# Altium PCB Volta-Interface.PcbDoc
Units mm, origin at the board's own origin, x right, y up, seen from the top; angles counter-clockwise.
Board outline 90 x 26 mm, 2 copper layers (Component Side, Bottom Layer), stack 1.071 mm thick; 49 components, 34 nets, 183 pads, 61 vias.
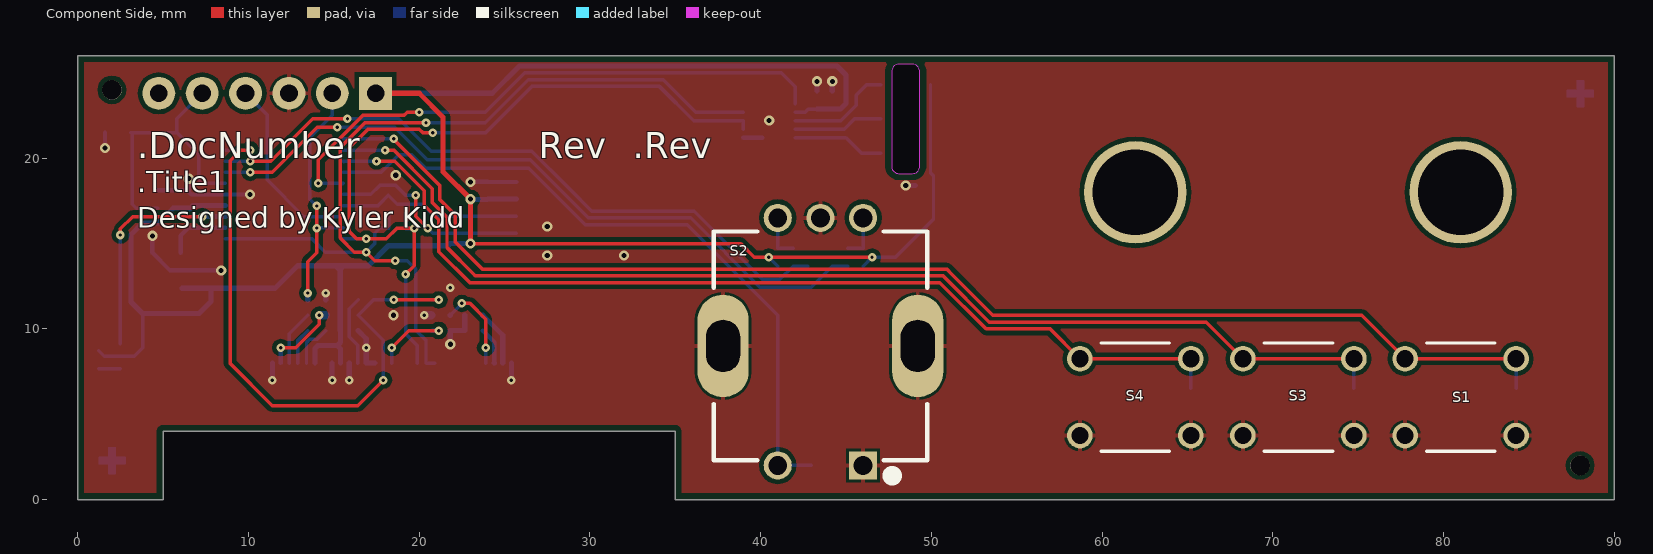
[diagram p0: Component Side view]
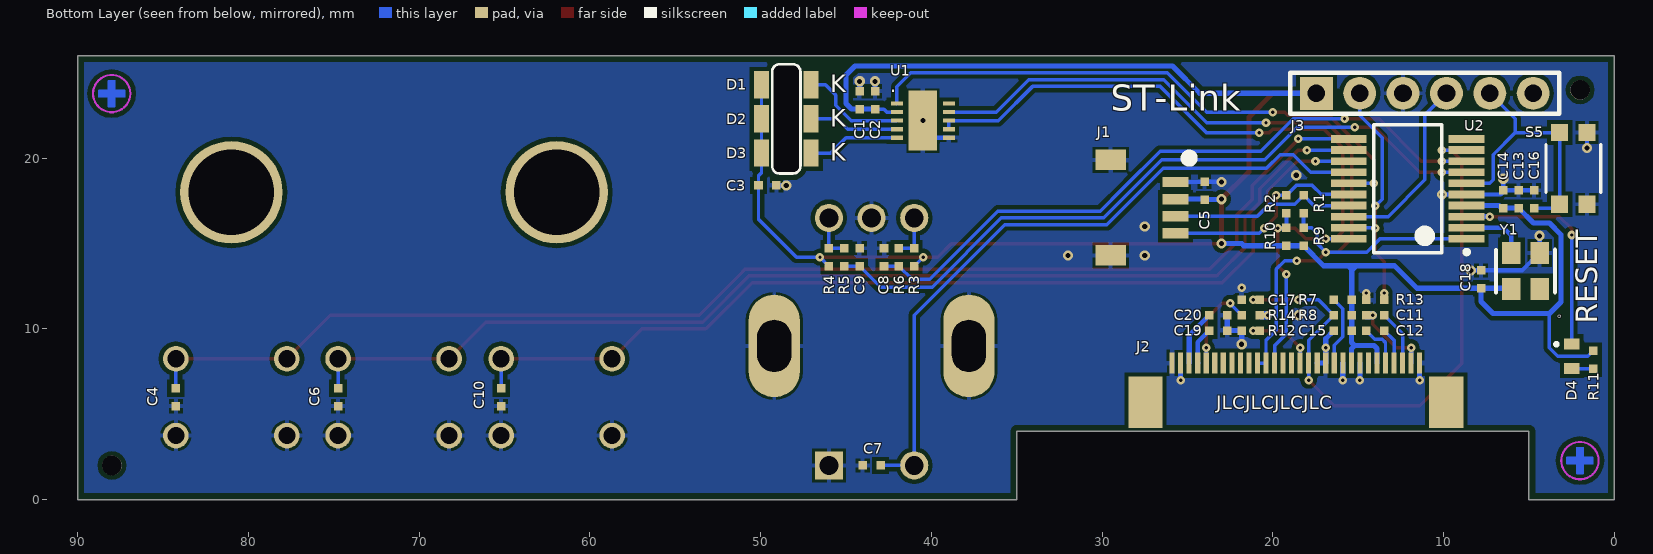
[diagram p1: Bottom Layer view, seen from below]
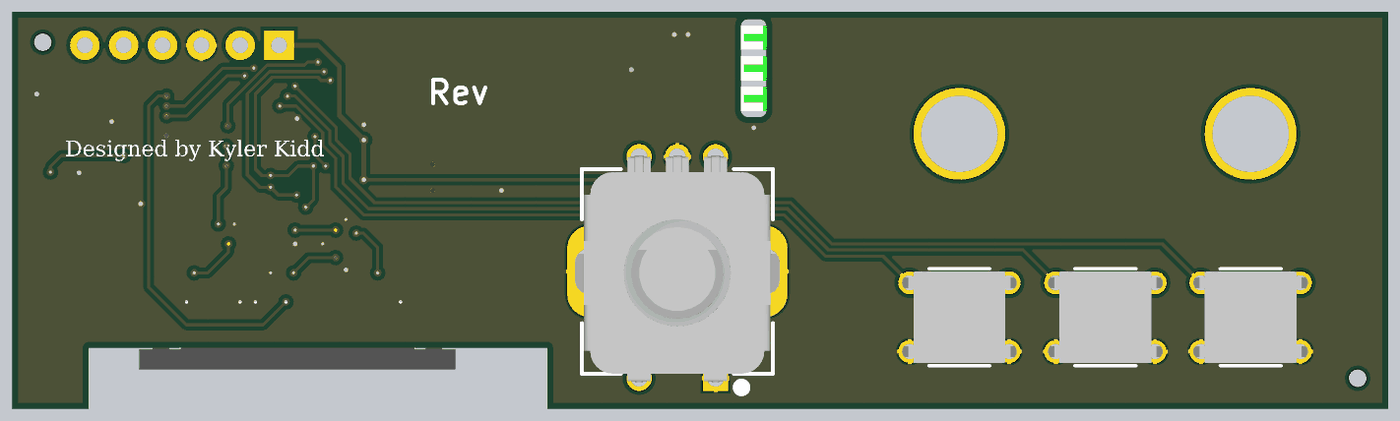
[diagram p2: 3D render of the assembled board from above, using the file's embedded part models]
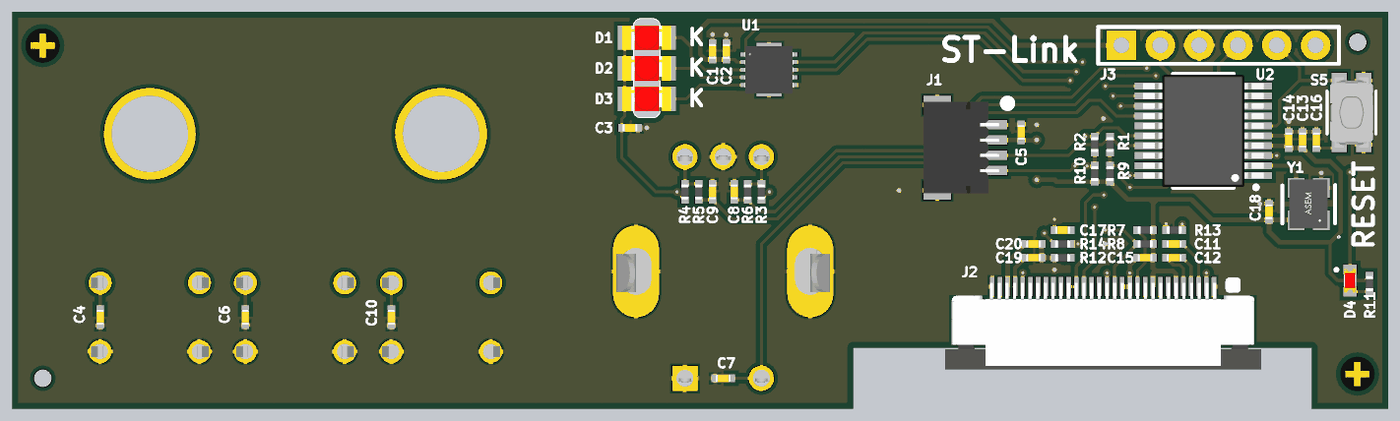
[diagram p3: 3D render of the assembled board from below, using the file's embedded part models]

## Layer stack, top to bottom
Top Solder: solder mask 0.0102, Solder Resist, Dk 3.5
Component Side: signal copper 0.0356
Dielectric 1: core 1, FR-4, Dk 4.2
Bottom Layer: signal copper 0.0356
Solder Side: solder mask 0.0102, Solder Resist, Dk 3.5

## Board outline
0,0 0,26 90,26 90,0 35,0 35,4 5,4 5,0
cut-out: 47.666,19.55 ccw(c48.11,19.544) 48.104,19.1 48.879,19.1 ccw(c48.885,19.544) 49.329,19.537 49.329,25.05 ccw(c48.885,25.056) 48.891,25.5 48.866,25.5 48.116,25.5 ccw(c48.11,25.056) 47.666,25.063

## Design rules (kind name [scope] priority, off if disabled: settings)
BoardOutlineClearance [All] p1: gap=0.381 ignorepadtopadclearanceinfootprint=FALSE
Clearance "Clearance Polygons" [InPolygon] p1: gap=0.254 ignorepadtopadclearanceinfootprint=FALSE except(0: Arc-Hole Track-Hole SMDPad-Hole THPad-Hole Via-Hole Fill-Hole Poly-Hole Region-Hole Text-Hole)
Clearance [All] p2: gap=0.127 ignorepadtopadclearanceinfootprint=FALSE except(0: Arc-Hole Track-Hole SMDPad-Hole THPad-Hole Via-Hole Fill-Hole Poly-Hole Region-Hole Text-Hole)
ComponentClearance "HM-TRP & UFL" [InComponent('X1') vs InComponent('U1')] p1: gap=0 collisioncheckmode=3 verticalgap=0 showdistances=FALSE
ComponentClearance [All] p2: gap=0.025 collisioncheckmode=3 verticalgap=0.025 showdistances=FALSE
DiffPairsRouting [All] p1: maxlimit=10 minlimit=0.127 mostfreqgap=0.203 toplayer_minwidth=0.127 toplayer_maxwidth=0.381 toplayer_prefwidth=0.203 bottomlayer_minwidth=0.127 bottomlayer_maxwidth=0.381 bottomlayer_prefwidth=0.203 maxuncoupledlength=12.7
HoleSize [All] p1: absolutevalues=TRUE maxlimit=6.731 minlimit=0.2 maxpercent=80.000 minpercent=20.000
HoleToHoleClearance [All] p1: gap=0.254 allowstackedmicrovias=FALSE
MinimumAnnularRing [All] p1: minimumring=0.102
MinimumSolderMaskSliver [All] p1: minsoldermaskwidth=0
PlaneClearance [All] p1: clearance=0.254
PlaneConnect [All] p1: planeconnectstyle=Relief reliefexpansion=0.102 reliefentries=4 reliefconductorwidth=0.152 reliefairgap=0.152
PolygonConnect "Via connect style" [isVia] p1: connectstyle=Direct reliefconductorwidth=0.254 reliefentries=4 polygonreliefangle="90 Angle" airgapwidth=0.254
PolygonConnect [All] p2: connectstyle=Relief reliefconductorwidth=0.254 reliefentries=4 polygonreliefangle="90 Angle" airgapwidth=0.152
RoutingCorners [All] p1: cornerstyle=45-Degree minsetback=1.25 maxsetback=1.25
RoutingVias [All] p1: holewidth=0.305 width=0.559 viastyle="Through Hole" minholewidth=0.254 minwidth=0.457 maxholewidth=2.54 maxwidth=2.896
SilkToSilkClearance [All] p1: silktosilkclearance=0
SilkToSolderMaskClearance [IsPad] p1: minsilkscreentomaskgap=0.025 clearancetoexposedcopper=TRUE
SolderMaskExpansion [All] p1: expansion=0.064
Width GND [InNet('GND')] p1: maxlimit=0.762 minlimit=0.254 preferedwidth=0.508
Width Power [InNetClass('Power')] p2: maxlimit=1.016 minlimit=0.508 preferedwidth=0.762
Width 3V3 [InNetClass('3V3')] p3: maxlimit=0.762 minlimit=0.254 preferedwidth=0.508
Width [All] p4: maxlimit=10.16 minlimit=0.152 preferedwidth=0.203
20 further rules are at their usual default settings.

## Classes and differential pairs
component class Interface: C1 C2 C3 C4 C5 C6 C7 C8 C9 C10 C11 C12 C13 C14 C15 C16 C17 C18 C19 C20 D4 J1 J2 J3 R1 R2 R3 R4 R5 R6 R7 R8 R9 R10 R11 R12 R13 R14 S2 S5 U1 U2 Y1

## Components (designator, comment, footprint, x,y, rotation, side; value= is the part's Value field where it differs from the comment)
C1 "2.2uF" 0402 44.2,23.4 r270 bottom
C2 "0.1uF" 0402 43.3,23.4 r270 bottom
C3 "2.2uF" 0402 49.6,18.4 r0 bottom
C4 "2.2uF" 0402 84.25,6 r270 bottom
C5 "2.2uF" 0402 24,18.1 r270 bottom
C6 "2.2uF" 0402 74.75,6 r270 bottom
C7 "2.2uF" 0402 43.5,2 r180 bottom
C8 "0.01uF" 0402 42.775,14.2 r270 bottom
C9 "0.01uF" 0402 44.2,14.2 r270 bottom
C10 "2.2uF" 0402 65.2,6 r270 bottom
C11 "2.2uF" 0402 14,10.8 r180 bottom
C12 "2.2uF" 0402 14,9.9 r0 bottom
C13 "2.2uF" 0402 5.6,17.6 r270 bottom
C14 "0.1uF" 0402 6.5,17.6 r270 bottom
C15 "2.2uF" 0402 15.9,9.9 r180 bottom
C16 "0.1uF" 0402 4.7,17.6 r270 bottom
C17 "0.1uF" 0402 21.3,11.7 r180 bottom
C18 "0.01uF" 0402 7.8,12.9 r270 bottom
C19 "2.2uF" 0402 23.2,9.9 r0 bottom
C20 "10uF" 0402 23.2,10.8 r0 bottom
D1 "LED" 1206_LED 48.5,24.3 r180 bottom
D2 "LED" 1206_LED 48.5,22.3 r180 bottom
D3 "LED" 1206_LED 48.5,20.3 r180 bottom
D4 "LED_GRN" 0603_LED_Red 2.5,8.4 r90 bottom
J1 "CCSH-W10R-04TR-BK-A" PCBCOMPONENT_1 30.4,20.5 r270 bottom
J2 "ER-CON30HT-1" ER-CON30HT-1 18.65,5 r180 bottom
J3 "DNP" 801-93-006-10-012000 11.1,23.8 r180 bottom
R1 "DNP" 0402 18.2,17.3 r90 bottom
R2 "DNP" 0402 19.2,17.3 r90 bottom
R3 "10k" 0402 41,14.2 r90 bottom
R4 "10k" 0402 46,14.2 r90 bottom
R5 "10k" 0402 45.1,14.2 r270 bottom
R6 "10k" 0402 41.9,14.2 r270 bottom
R7 "10k" 0402 15.9,11.7 r180 bottom
R8 "10k" 0402 15.9,10.8 r180 bottom
R9 "2.7k" 0402 18.2,15.4 r270 bottom
R10 "2.7k" 0402 19.2,15.4 r270 bottom
R11 "1k" 0402 1.221,8.2 r90 bottom
R12 "10k" 0402 21.3,9.9 r180 bottom
R13 "10k" 0402 14,11.7 r0 bottom
R14 "390k" 0402 21.3,10.8 r0 bottom
S1 "B3F-105X" B3F-105X 81,6 r180 top
S2 "PEC11R-4115F-S0018" PEC11R-4xxxF-Sxxxx 43.5,9 r180 top locked
S3 "B3F-105X" B3F-105X 71.5,6 r180 top
S4 "B3F-105X" B3F-105X 61.95,6 r180 top
S5 "KMR243GLFG" "KMR 2 SERIES" 2.4,19.4 r90 bottom
U1 "IS31FL3193" DFN-10 40.5,22.2 r180 bottom
U2 "STM32G031F8P6" TSSOP-20 12.1,18.2 r0 bottom
Y1 "ASE-12.000-MHZ-E-T" ASE-XXXXX-X-X-X 5.2,13.4 r90 bottom

## Footprints (in the part's own frame and the unit in brackets; to place one, negate y for a bottom-side part, rotate by r counter-clockwise, add the part's x,y. Pads: shape width x height; smd on the part's side, far side on the other; paste and mask are expansions set on the pad)
0402 [mm] "Chip Capacitor; Body 1.0 x 0.5 mm (LxW typ)"
  rect 0.5x0.5 smd mask+0.038: 1(-0.525,0) 2(0.525,0)
  body extent -0.5,-0.25 0.5,0.25, height 0.6
0603_LED_Red [mm]
  rect 0.65x0.9 smd mask+0.038: 1(-0.725,0) 2(0.725,0)
  silkscreen extent 0.64,0.83 0.76,0.95, body extent -0.8,-0.4 0.8,0.4, height 0.6
801-93-006-10-012000 [mil] "CONN SOCKET STRIP LOPRO 0.100 PITCH 6POS"
  rect 76x76 hole 41 mask+1.5: 1(-250,0)
  round 76 hole 41 mask+1.5: 2(-150,0) 3(-50,0) 4(50,0) 5(150,0) 6(250,0)
  silkscreen extent -310,-48 310,48, body extent -310,-48 310,48, height 165
1206_LED [mm] "SMD LED 3.2 x 1.6 mm (LxW typ)"
  rect 0.9x1.6 smd mask+0.038: 1(-1.45,0) 2(1.45,0)
  body extent -1.6,-0.8 1.6,0.8, height 1.79
ASE-XXXXX-X-X-X [mil] "OSC XO x.xxxMHZ CMOS SMD"
  rect 51x43 smd mask+1.5: 1(-41.5,-32.5) 2(41.5,-32.5) 3(41.5,32.5) 4(-41.5,32.5)
  silkscreen extent -50,-68 49,68, body extent -62,-48 64,50, height 34
B3F-105X [mm]
  round 1.5 hole 1: 1(-3.25,2.25) 1(3.25,2.25) 2(-3.25,-2.25) 2(3.25,-2.25)
  silkscreen extent -2,-3.18 2,3.18, body extent -3.85,-3 3.85,3, height 10
DFN-10 [mm]
  rect 0.7x0.25 smd mask+0.038: 1(-1.525,1) 2(-1.525,0.5) 3(-1.525,0) 4(-1.525,-0.5) 5(-1.525,-1) 6(1.525,-1) 7(1.525,-0.5) 8(1.525,0) 9(1.525,0.5) 10(1.525,1)
  rect 1.65x3.5 smd mask+0.038: 11(0,0)
  body extent -1.6,-1.55 1.6,1.55, height 0.81
ER-CON30HT-1 [mm]
  rect 0.3x1.25 smd paste+0: 1(7.25,3) 2(6.75,3) 3(6.25,3) 4(5.75,3) 5(5.25,3) 6(4.75,3) 7(4.25,3) 8(3.75,3) 9(3.25,3) 10(2.75,3) 11(2.25,3) 12(1.75,3) 13(1.25,3) 14(0.75,3) 15(0.25,3) 16(-0.25,3) 17(-0.75,3) 18(-1.25,3) 19(-1.75,3) 20(-2.25,3) 21(-2.75,3) 22(-3.25,3) 23(-3.75,3) 24(-4.25,3) 25(-4.75,3) 26(-5.25,3) 27(-5.75,3) 28(-6.25,3) 29(-6.75,3) 30(-7.25,3)
  rect 2x3 smd paste+0: S1(8.81,0.7) S2(-8.81,0.7)
  rrect50% 1x1 on Bottom Overlay: ""(8.5,3.1)
  body extent -10.32,-2.4 10.33,3.25, height 2.2
"KMR 2 SERIES" [mm]
  rect 1x1 smd: 1(-2.1,0.8) 1(2.1,0.8) 2(-2.1,-0.8) 2(2.1,-0.8)
  silkscreen extent -1.4,-1.6 1.4,1.6, body extent -2.3,-1.4 2.3,1.4, height 1.92
PCBCOMPONENT_1 [mm]
  rect 0.6x1.55 smd: 1(1.9,4.7) 2(2.9,4.7) 3(3.9,4.7) 4(4.9,4.7)
  rect 1.2x1.8 smd: S1(0.6,0.9) S2(6.2,0.9)
  silkscreen extent 0.3,5.3 0.7,5.7, body extent 0.4,0.01 6.4,4.96, height 3.25
PEC11R-4xxxF-Sxxxx [mm]
  rect 1.65x1.65 hole 1.1: 1(-2.502,7)
  round 1.65 hole 1.1: 2(2.498,7) A(-2.502,-7.5) B(2.498,-7.5) COM(-0.002,-7.5)
  oval 3x6 hole 1.981 slot 3.048 at 90 deg: S1(-5.702,0) S2(5.698,0)
  silkscreen extent -6.25,-6.7 6.25,7.85, body extent -7,-7.6 7,7.3, height 21.6
TSSOP-20 [mm] "Plastic Small Outline"
  rect 2.1x0.45 smd mask+0.038: 1(-3.45,2.925) 2(-3.45,2.275) 3(-3.45,1.625) 4(-3.45,0.975) 5(-3.45,0.325) 6(-3.45,-0.325) 7(-3.45,-0.975) 8(-3.45,-1.625) 9(-3.45,-2.275) 10(-3.45,-2.925) 11(3.45,-2.925) 12(3.45,-2.275) 13(3.45,-1.625) 14(3.45,-0.975) 15(3.45,-0.325) 16(3.45,0.325) 17(3.45,0.975) 18(3.45,1.625) 19(3.45,2.275) 20(3.45,2.925)
  silkscreen extent -3.57,-3.75 2,3.82, body extent -3.95,-3.66 3.95,3.67, height 1.98

## Part data
C1 C3 C4 C5 C6 C7 C10 C13: library part CAP, "Multilayer Ceramic Capacitors MLCC - SMD/SMT 2.2UF 25V 10% 0402", Manufacturer="Murata Electronics", Part Number=GRM155R61E225KE11D, Voltage=25V, ClassName=Interface
C2 C14 C16 C17: library part CAP, "CAP CER 0.1UF 50V X7R 0402", Manufacturer="Taiyo Yuden", Part Number=UMK105B7104KVHF, Voltage=50V, ClassName=Interface
C8 C9 C18: library part CAP, "CAP CER 0.01UF 100V X7R 0402", Manufacturer="Taiyo Yuden", Part Number=HMR105B7103MV-F, Voltage=100V, ClassName=Interface
C11 C12 C15 C19 C20: library part CAP, "CAP CER 10UF 10V X6S 0603", Manufacturer="Murata Electronics", Part Number=GRM188C81A106MA73D, Voltage=25V, ClassName=Interface
D4: library part LED_Red, "Standard LEDs - SMD HE Red 645 nm Water Clear", Manufacturer=Bivar, Part Number=SM0603HCL, ClassName=Interface
J1: Manufacturer=JST, ClassName=Interface, Part Number=CCSH-W10R-04TR-BK-A
J2: "30 PINS 0.5 PITCH SMD TOP CONTACT CONN", Manufacturer="EastRising Technology", ClassName=Interface, Part Number=ER-CON30HT-1
J3: library part 801-93-006-10-012000, "CONN SOCKET STRIP LOPRO 6POS", Manufacturer=Mill-Max, ClassName=Interface, Part Number=801-93-006-10-012000
R1 R2: library part RES, "Thick Film Resistors - SMD 1/16watt 0ohm Commercial Use", Manufacturer="Vishay / Dale", Part Number=CRCW04020000Z0EDC, ClassName=Interface
R3 R4 R5 R6 R13: library part RES, "Thick Film Resistors - SMD 10K OHM 1%", Manufacturer=Bourns, Part Number=CR0402-FX-1002GLF, ClassName=Interface
R7 R8 R12 R14: library part RES, "Thick Film Resistors - SMD 0603 5.1Kohm 5% High Voltage", Manufacturer="ROHM Semiconductor", Part Number=KTR03EZPJ512, ClassName=Interface
R9 R10: library part RES, "Thick Film Resistors - SMD 0402 2.7Kohms 1% AEC-Q200", Manufacturer=Panasonic, Part Number=ERJ-2RKF2701X, ClassName=Interface
R11: library part RES, "Thick Film Resistors - SMD ResA 0402 1k 1% 63mW TC100", Manufacturer=Bourns, Part Number=CR0402AFX-1001GLF, ClassName=Interface
S1 S3 S4: "SWITCH TACTILE SPST-NO 0.05A 24V", Manufacturer="Omron Electronics Inc-EMC Div", Part Number=B3F-105X
S2: library part PEC11R-4xxxF-Sxxxx, "ROTARY ENCODER MECHANICAL XXPPR", Manufacturer=Bourns, ClassName=Interface, Part Number=PEC11R-4115F-S0018
S5: library part "KMR 2 Series", "Tactile Switch SPST-NO Top Actuated Surface Mount", Manufacturer=C&K, Part Number=KMR243GFLG, ClassName=Interface
U1: "IC LED DRIVER LINEAR 42MA 10DFN", Manufacturer="Lumissil Microsystems", Part Number=IS31FL3193-DLS2-TR, ClassName=Interface
U2: library part STM32G031F6P6, "IC MCU 32BIT 64KB FLASH 20TSSOP", Manufacturer=STMicroelectronics, ClassName=Interface, Part Number=STM32G031F8P6
Y1: library part ASE-XXXXX-MHZ-X-X, "OSC XO 12.000MHZ CMOS SMD", Manufacturer=Abracon, ClassName=Interface, Part Number=ASE-12.000-MHZ-E-T

## Free pads (board coordinates)
  round 1.152 hole 1.152 unplated: TH(2,24) TH(88,2)
  round 6 hole 5: ""(61.95,18) ""(81,18)

## Via types
v1: diameter 0.5, hole 0.2, Component Side to Bottom Layer, tented both sides, 43 vias
v2: diameter 0.6, hole 0.3, Component Side to Bottom Layer, tented both sides, 18 vias

## Nets (pads, with @x,y where several pads share a name; then routed paths per layer and width w, separated by ;. In a path a pad name is that pad's centre, name@x,y a point inside that pad or via, vN(x,y) a via of type N, cw(c..) or ccw(c..) an arc to the next point about the centre after c; other vN are vias at no path point)
+3.3V: C1.2 C2.2 C3.2 C5.2 C13.2 C14.2 C15.2 C18.2 D1.1 D2.1 D3.1 J1.2 J2.6 J2.9 J3.1 R3.1 R4.1 R7.2 R8.2 R9.2 R10.2 R11.2 U1.2 U2.4 Y1.4 | length 134.2
  Component Side w0.203: v2@22.9,15 v2(23,15) 38.821,15 39.621,14.2 v1(40.475,14.2) v1(46.525,14.2)
  Component Side w0.305: J3.1 20,23.8 21.4,22.4 21.4,19.2 v2(23,17.6) v2(23,15)
  Bottom Layer w0.203: R11.2 1.546,8.4 3.3,8.4 3.8,8.9 3.8,10.9 ; C5.2 C5.2@24.025,17.6 ; v1(40.475,14.2) R3.1 ; U1.2 42.6,22.7 42.775,22.875 C2.2 ; R4.1 v1(46.525,14.2) 47.9,14.2 50.125,16.425 C3.2 50.125,18.975 49.95,19.15 D3.1 D2.1 D1.1
  Bottom Layer w0.305: Y1.4@6.1,12.4 6.125,12.375 C18.2 ; C14.2 C13.2 5.6,17.064 4.736,16.2 3.8,16.2 3.117,15.517 3.117,11.583 3.8,10.9 7.1,10.9 7.8,11.6 C18.2 ; C14.2@6.55,17.025 6.75,17.225 U2.4 ; J2.6 13.9,8.85 14.069,9.019 15.219,9.019 ; 15.375,13.425 15.1,13.7 ; J2.9 15.4,8.838 15.219,9.019 ; J3.1 24.284,23.8 25.884,25.4 44.469,25.4 45,24.869 45,23.2 44.675,22.875 C1.2 C2.2 ; v2(23,15) 21.825,15 21.7,14.875 R10.2 R9.2 17.025,13.7 15.6,13.7 ; v2(23,17.6) 23.025,17.575 C5.2 ; C5.2@24.025,17.6 J1.2 ; C18.2 11.545,12.375 12.87,13.7 15.1,13.7 ; 15.1,13.7 15.6,13.7 ; 15.219,9.019 15.4,9.2 15.4,9.875 C15.2 R8.2 R7.2 15.375,12.7 15.375,13.475 15.6,13.7
BUTTON_A: C4.1 S1.2 U2.11 | length 77.2
  Component Side w0.203: v1@18.475,21.125 21.2,18.4 21.2,17.576 22.1,16.676 22.1,15.1 23.694,13.506 50.894,13.506 51.2,13.2 53.6,10.8 ; 53.602,10.798 75.202,10.798 77.75,8.25 S1.2@84.25,8.25
  Bottom Layer w0.203: U2.11 v1@18.475,21.125 ; C4.1 S1.2@84.25,8.25
  other v1: 18.5,21.125
BUTTON_B: C6.1 S3.2 U2.12 | length 67.5
  Component Side w0.203: v1(18,20.475) 18.5,20.475 20.775,18.2 20.775,17.4 21.63,16.545 21.63,14.77 23.2,13.2 23.3,13.1 50.7,13.1 53.4,10.4 66.1,10.4 68.25,8.25 S3.2@74.75,8.25
  Bottom Layer w0.203: U2.12 v1(18,20.475) ; C6.1 S3.2@74.75,8.25
BUTTON_C: C10.1 S4.2 U2.13 | length 57.9
  Component Side w0.203: v1(17.5,19.825) 18.575,19.825 20.3,18.1 20.3,17.251 21.154,16.397 21.154,14.521 22.975,12.7 ; 22.9,12.8 23,12.7 50.5,12.7 53.2,10 56.95,10 58.7,8.25 S4.2@65.2,8.25
  Bottom Layer w0.203: U2.13@15.575,19.8 U2.13 v1(17.5,19.825) ; C10.1 S4.2@65.2,8.25
DISP_RST: C17.2 J2.14 R8.1 U2.9 | length 35.3
  Component Side w0.203: v1(10.1,20.475) 9.55,20.475 8.929,19.854 8.929,7.971 11.4,5.5 16.4,5.5 v1(17.9,7) ; v1(18.5,11.7) v1(21.15,11.7)
  Bottom Layer w0.203: U2.9 v1(10.1,20.475) ; v1(17.9,7) J2.14 17.9,9.325 R8.1 17.325,11.7 v1(18.5,11.7) ; C17.2 v1(21.15,11.7)
ENC_A: C9.2 R5.2 U2.7 | length 41.9
  Component Side w0.203: v1(10.1,19.175) 11.4,19.175 14.025,21.8 v1(15.2,21.8)
  Bottom Layer w0.203: U2.7 v1(10.1,19.175) ; v1(15.2,21.8) 18.575,21.8 20.475,19.9 26.5,19.9 29.9,16.5 35.9,16.5 39.954,12.446 42.971,12.446 C9.2 R5.2
ENC_B: C8.2 R6.2 U2.8 | length 39.4
  Component Side w0.203: v1(10.1,19.825) 11.3,19.825 13.775,22.3 v1(15.8,22.3)
  Bottom Layer w0.203: U2.8 v1(10.1,19.825) ; v1(15.8,22.3) 18.8,22.3 20.7,20.4 26.6,20.4 28.75,18.25 30.1,16.9 36.102,16.9 40.102,12.9 41.125,12.9 R6.2 C8.2
ENC_SW: C7.2 S2.2 U2.14 | length 40.5
  Bottom Layer w0.203: U2.14 17.775,19.175 18.8,20.2 19.573,20.2 20.373,19.4 26.425,19.4 29.725,16.1 32.2,16.1 ; 32.225,16.1 35.7,16.1 41.002,10.798 S2.2 C7.2
EXT_SCL: J1.4 R2.2 U2.16 | length 12.3
  Component Side w0.203: v1(19.8,17.825) 19.8,16.6 v1(20.5,15.9) ; v1@20.527,15.927 v1@20.554,15.9
  Bottom Layer w0.203: U2.16 17.175,17.875 17.7,18.4 18.625,18.4 R2.2 v1(19.8,17.825) ; v1(20.5,15.9) 20.8,15.6 J1.4
EXT_SDA: J1.3 R1.2 U2.17 | length 10.9
  Bottom Layer w0.203: U2.17 17.6,17.225 R1.2 18.725,17.3 20.2,17.3 20.9,16.6 J1.3
GND: C1.1 C2.1 C3.1 C4.2 C5.1 C6.2 C7.1 C8.1 C9.1 C10.2 C13.1 C14.1 C15.1 C16.1 C17.1 C18.1 C19.1 C20.1 J1.1 J1.S1 J1.S2 J2.1 J2.8 J2.10 J2.12 J2.13 J2.29 J2.30 J3.3 R12.1 R13.2 R14.1 S1.1 S2.1 S2.COM S2.S1 S2.S2 S3.1 S4.1 S5.2 U1.6 U1.11 U2.5 Y1.2 | length 28
  Bottom Layer w0.254: v2(1.6,20.6) S5.2@1.6,21.5 ; v2(4.374,15.45) Y1.2 5.404,13.425 C18.1 v2(8.4,13.425) ; C16.1 C13.1 C14.1 v2(6.5,18.8) ; C14.1@6.5,18.025 6.65,17.875 U2.5 v2(10.084,17.875) ; v2(23,18.6) 23.025,18.625 C5.1 24.025,18.6 J1.1 ; U1.6 U1.11@40.1,21.2
  Bottom Layer w0.305: v1(11.4,7) J2.1 ; R13.2 v1(14.525,12.1) ; v1(14.9,7) J2.8 ; v1(15.9,7) J2.10 ; C15.1 16.9,9.425 v1(16.9,8.9) J2.12 J2.13 ; v2(21.825,9.1) R12.1 C19.1 C20.1 ; v1(25.4,7) J2.29 ; C2.1 v2(43.3,24.5) ; C1.1 v2(44.2,24.5) ; v2(48.5,18.4) C3.1
  Bottom Layer w0.508: v1(20.3,10.8) R14.1@20.7,10.8
  other v1: 21.825,12.4
  other v2: 18.5,10.8 27.5,14.3 32,14.3 27.5,16 18.625,19 40.5,22.2
LED_DVR_EN: U1.1 U2.15 | length 34.2
  Component Side w0.203: v1(14.1,18.525) 14.1,19.915 16.685,22.5 19.1,22.5 19.3,22.7 v1(20,22.7)
  Bottom Layer w0.203: v1(14.1,18.525) U2.15 U2.15@15.525,18.5 ; v1(20,22.7) 23.875,22.7 26.175,25 41.2,25 42.025,24.175 U1.1
MCU_SCL: J2.18 R2.1 R10.1 U1.7 U1.8 U2.20 | length 46.3
  Component Side w0.203: v1(19.2,13.2) 19.7,13.7 v1(19.7,15.9) 18.7,15.9 18.075,15.275 v1(16.9,15.275) 16.329,15.275 15.9,15.704 15.9,20.6 17,21.7 20,21.7 20.2,21.5 v1(20.8,21.5)
  Bottom Layer w0.203: U2.20 v1(16.9,15.275) ; v1(19.2,13.2) 19.2,9.719 19.9,9.019 J2.18 ; v1(20.8,21.5) 23.9,21.5 26.6,24.2 34.075,24.2 36.075,22.2 U1.8 U1.7
  Bottom Layer w0.254: R2.1 R10.1 19.225,15.9 v1(19.7,15.9)
MCU_SDA: J2.19 J2.20 R1.1 R9.1 U1.9 U2.1 | length 54.4
  Component Side w0.203: v1(18.6,14) 17.4,14 v1(16.9,14.5) 16.2,14.5 15.375,15.325 15.375,20.625 16.825,22.075 v1(20.4,22.075)
  Bottom Layer w0.203: U2.1 13.725,15.275 14.5,14.5 v1(16.9,14.5) 17.4,15 17.4,15.6 17.725,15.925 R9.1 ; v1(18.6,14) 19.306,14 19.8,13.506 19.8,9.925 20.4,9.325 J2.19 J2.20 ; v1(20.4,22.075) 23.875,22.075 26.4,24.6 34.3,24.6 36.2,22.7 U1.9
  Bottom Layer w0.254: R9.1 R1.1
NetC11_1: C11.1 J2.2 | length 4.6
  Component Side w0.203: v1(11.9,8.9) 12.775,8.9 14.15,10.275 v1(14.15,10.8)
  Bottom Layer w0.254: J2.2 v1(11.9,8.9)
  Bottom Layer w0.508: v1(14.15,10.8) C11.1
NetC11_2: C11.2 J2.3 | length 3.2
  Bottom Layer w0.203: J2.3 12.4,9.725 C11.2
NetC12_1: C12.1 J2.4 | length 2.1
  Bottom Layer w0.203: J2.4 12.9,9.325 C12.1
NetC12_2: C12.2 J2.5 | length 2.6
  Bottom Layer w0.203: J2.5 13.4,9.2 13.6,9.4 14.025,9.4 C12.2
NetC19_2: C19.2 J2.27 | length 2.2
  Bottom Layer w0.254: C19.2 24.404,9.221 J2.27@24.404,8.004
  Bottom Layer w0.305: J2.27 J2.27@24.404,8.004
NetC20_2: C20.2 J2.28 | length 3.3
  Bottom Layer w0.305: C20.2 24.9,9.625 J2.28
NetD1_2: D1.2 U1.3 | length 6.2
  Bottom Layer w0.203: U1.3 44.7,22.2 45.6,23.1 45.6,23.7 46.2,24.3 D1.2
NetD2_2: D2.2 U1.4 | length 5.3
  Bottom Layer w0.203: U1.4 44.9,21.7 45.5,22.3 D2.2
NetD3_2: D3.2 U1.5 | length 5.4
  Bottom Layer w0.203: U1.5 45,21.2 45.9,20.3 D3.2
NetD4_1: D4.1 R11.1 | length 1.3
  Bottom Layer w0.203: R11.1 D4.1
NetD4_2: D4.2 U2.3 | length 13.2
  Component Side w0.203: v1(2.5,15.5) 2.5,15.861 3.214,16.575 v1(7.3,16.575)
  Bottom Layer w0.203: D4.2 v1(2.5,15.5)
  Bottom Layer w0.305: v1(7.3,16.575) U2.3
NetJ2_11: J2.11 R7.1 | length 4.1
  Bottom Layer w0.203: J2.11 16.4,9.05 15.9,9.55 15.9,11.175 R7.1
NetJ2_26: J2.26 R14.2 | length 5.3
  Component Side w0.203: v1(22.5,11.5) 22.975,11.5 23.9,10.575 v1(23.9,8.9)
  Bottom Layer w0.203: R14.2 22.5,11.475 v1(22.5,11.5) ; J2.26 v1(23.9,8.9)
NetR3_2: R3.2 R6.1 S2.B | length 2.7
  Bottom Layer w0.203: S2.B 41,16.498 R3.2 R6.1
NetR4_2: R4.2 R5.1 S2.A | length 2.7
  Bottom Layer w0.203: R5.1 R4.2 46,16.498 S2.A
NetU2_2: U2.2 Y1.3 | length 3.8
  Bottom Layer w0.254: Y1.3 6.025,15.457 6.493,15.925 U2.2
NRST: C16.2 J3.5 S5.1 U2.6 | length 16.3
  Bottom Layer w0.203: S5.1@3.1,21.5 3.2,21.4 3.2,17.3 3.425,17.075 C16.2 ; S5.1@3.2,21.5 5.8,21.5 ; J3.5 5.8,22.31 5.8,21.5 ; U2.6 7.3,18.525 7.1,18.725 7.1,20.2 5.8,21.5
SA0: J2.15 R12.2 | length 4.4
  Component Side w0.203: v1(18.4,8.9) 19.401,9.901 v1(21.15,9.901)
  Bottom Layer w0.203: J2.15 v1(18.4,8.9)
  Bottom Layer w0.254: R12.2 v1(21.15,9.901)
SWCLK: J3.2 R13.1 U2.19 | length 14.6
  Component Side w0.203: v1(13.475,12.1) 13.475,13.925 14,14.45 v1(14,15.908) v1(14,17.2)
  Bottom Layer w0.203: v1(14,15.908) 14.017,15.925 U2.19 ; v1(14,17.2) 13.6,17.6 13.6,21.2 14.91,22.51 J3.2
  Bottom Layer w0.305: R13.1 v1(13.475,12.1)
SWDIO: J3.4 U2.18 | length 10.9
  Bottom Layer w0.203: J3.4 11.1,22.53 11.1,18.725 13.25,16.575 U2.18
pads on no net: J2. J2.7 J2.16 J2.17 J2.21 J2.22 J2.23 J2.24 J2.25 J2.S1 J2.S2 J3.6 U1.10 U2.10 Y1.1

## Polygon pours and split planes (outlines as drawn)
GND on Component Side "Top_GND" (solid, remove dead copper, pour order 56): 0,0 90,0 90,26 0,26
GND on Bottom Layer "Bottom_GND" (solid, remove dead copper, pour order 57): 0,0 90,0 90,26 0,26

## Keep-outs
Bottom Layer:
  circle w0.127: c88.01,23.782 r1.092
  circle w0.127: c2.01,2.282 r1.092

## Other copper
Bottom Layer:
  region: 88.22,24.563 88.228,24.544 88.228,24 88.772,24 88.791,23.992 88.799,23.973 88.799,23.592 88.791,23.572 88.772,23.564 88.228,23.564 88.228,23.02 88.22,23.001 88.201,22.993 87.82,22.993 87.8,23.001 87.792,23.02 87.792,23.564 87.248,23.564 87.229,23.572 87.221,23.592 87.221,23.973 87.229,23.992 87.248,24 87.796,24 87.792,24.544 87.796,24.554 87.8,24.563 87.81,24.567 87.819,24.572 87.819,24.571 87.82,24.572 88.201,24.572
  region: 2.22,3.063 2.228,3.044 2.228,2.5 2.772,2.5 2.791,2.492 2.799,2.473 2.799,2.092 2.791,2.072 2.772,2.064 2.228,2.064 2.228,1.52 2.22,1.501 2.201,1.493 1.82,1.493 1.8,1.501 1.792,1.52 1.792,2.064 1.248,2.064 1.229,2.072 1.221,2.092 1.221,2.473 1.229,2.492 1.248,2.5 1.796,2.5 1.792,3.044 1.796,3.054 1.8,3.063 1.81,3.067 1.819,3.072 1.819,3.071 1.82,3.072 2.201,3.072

## Silkscreen, mask and mechanical layers (free items; w line width, h text height)
Top Overlay:
  text ".DocNumber" at 3.5,20 h1.52
  text "Rev" at 27,20 h1.52
  text ".Rev" at 32.5,20 h1.52
  text ".Title1" at 3.5,18 h1.22
  text "Designed by Kyler Kidd" at 3.5,15.5 h2.03
Bottom Overlay:
  lines w0.152: 48.866,25.5 48.116,25.5 ccw(c48.11,25.056) 47.666,25.063 47.666,19.55 ccw(c48.11,19.544) 48.104,19.1 48.879,19.1 ccw(c48.885,19.544) 49.329,19.537 49.329,25.05 ccw(c48.885,25.056) 48.891,25.5
  text "ST-Link" at 29.5,22.784 h1.52
  text "RESET" at 1,10.3 h1.27 r270
  text "JLCJLCJLCJLC" at 23.3,5.3 h0.8
Solder Side:
  circle w0.254: c88.014,23.782 r1.001
  circle w0.254: c2.014,2.282 r1.001
  rectangle: 87.064,23.357 88.939,24.232
  rectangle: 87.239,24.207 88.789,24.582
  rectangle: 87.589,22.757 88.389,24.807
  rectangle: 87.214,22.982 88.789,23.382
  rectangle: 1.214,1.482 2.789,1.882
  rectangle: 1.589,1.257 2.389,3.307
  rectangle: 1.239,2.707 2.789,3.082
  rectangle: 1.064,1.857 2.939,2.732
  region: 88.22,24.563 88.228,24.544 88.228,24 88.772,24 88.791,23.992 88.799,23.973 88.799,23.592 88.791,23.572 88.772,23.564 88.228,23.564 88.228,23.02 88.22,23.001 88.201,22.993 87.82,22.993 87.8,23.001 87.792,23.02 87.792,23.564 87.248,23.564 87.229,23.572 87.221,23.592 87.221,23.973 87.229,23.992 87.248,24 87.796,24 87.792,24.544 87.796,24.554 87.8,24.563 87.81,24.567 87.819,24.572 87.819,24.571 87.82,24.572 88.201,24.572
  region: 2.22,3.063 2.228,3.044 2.228,2.5 2.772,2.5 2.791,2.492 2.799,2.473 2.799,2.092 2.791,2.072 2.772,2.064 2.228,2.064 2.228,1.52 2.22,1.501 2.201,1.493 1.82,1.493 1.8,1.501 1.792,1.52 1.792,2.064 1.248,2.064 1.229,2.072 1.221,2.092 1.221,2.473 1.229,2.492 1.248,2.5 1.796,2.5 1.792,3.044 1.796,3.054 1.8,3.063 1.81,3.067 1.819,3.072 1.819,3.071 1.82,3.072 2.201,3.072
Mechanical 1:
  lines w0.254: 58.862,12.452 cw(c61.95,18) 65.038,12.452 ; 58.875,12.45 61.95,12.45 65.025,12.45 ; 77.912,12.452 cw(c81,18) 84.088,12.452 ; 77.925,12.45 81,12.45 84.075,12.45 ; 0,0 5,0 5,4 35,4 35,0 90,0 90,26 0,26 0,0
Mechanical 15:
  lines w0.2: 60.95,18 62.95,18 ; 61.95,17 61.95,19 ; 80,18 82,18 ; 81,17 81,19
ASSY_TOP:
  drawing of 322 lines, arcs and shapes, not listed
  text "SH" at 401.173,299.933 h2.54
  text "DWG NO" at 326.021,299.518 h2.54
  text ".DocNumber" at 342.672,296.678 h3.05
  text "2" at -196.323,296.19 h5.08
  text "4" at 19.75,296.19 h5.08
  text "8" at 444.108,296.19 h5.08
  text "1" at -304.051,296.03 h5.08
  text "3" at -88.329,296.03 h5.08
  text "5" at 127.749,296.03 h5.08
  text "6" at 235.696,296.03 h5.08
  text "1" at 406.172,295.662 h3.05
  text "REVISION HISTORY" at 352.324,289.283 h2.54
  text "REV" at 327.94,283.216 h2.54
  text "DESCRIPTION" at 373.66,283.216 h2.54
  text "DATE" at 432.08,283.216 h2.54
  text "APPROVED" at 462.56,283.216 h2.54
  text ".Hist1Rev" at 328.845,278.615 h2.54
  text ".Hist1Desc" at 340.64,278.136 h2.54
  text ".Hist1Date" at 424.46,278.136 h2.54
  text ".Hist1Appr" at 454.94,278.136 h2.54
  text "NOTES" at -317.22,276.86 h10.16
  text ".Hist2Rev" at 328.845,273.002 h2.54
  text ".Hist2Desc" at 340.64,272.522 h2.54
  text ".Hist2Date" at 424.46,272.522 h2.54
  text ".Hist2Appr" at 454.94,272.522 h2.54
  text "1. DIMENSIONING AND TOLERANCING PER ASME Y14.5M-1994" at -317.22,269.24 h5.08
  text ".Hist3Rev" at 328.845,267.414 h2.54
  text ".Hist3Desc" at 340.64,266.934 h2.54
  text ".Hist3Date" at 424.46,266.934 h2.54
  text ".Hist3Appr" at 454.94,266.934 h2.54
  text "2. INTERPRET PER ASME Y14.100M" at -317.22,261.62 h5.08
  text "3. ASSEMBLE PER IPC-A-610, CLASS 2" at -317.22,254 h5.08
  text "4. SOLDER PER J-STD-001, CLASS 2. USE LEAD-FREE SOLDER" at -317.22,246.38 h5.08
  text "5. ALL PARTS SHOWN MAY NOT BE INSTALLED. FOR SCHEMATIC, SEE SEPARATE PARTS LIST" at -317.22,238.76 h5.08
  text "A" at -346.12,232.525 h5.08
  text "A" at 492.167,232.525 h5.08
  text "6. DATA INCLUDED IN PARENTHESIS IS FOR REFERENCE ONLY" at -317.22,231.14 h5.08
  text "7. FOR COMPONENTS WITH REFERENCE DESIGNATORS, REFER TO PARTS LIST BY REFERENCE DESIGNATION" at -317.22,223.52 h5.08
  text "8. ELECTROSTATIC DISCHARGE CONTROL PROGRAM FOR PROTECTION OF ELECTRICAL AND ELECTRONIC" at -317.22,215.9 h5.08
  text "PARTS, ASSEMBLIES, AND EQUIPMENT SHALL BE PER IPC-610 OR BETTER" at -317.22,208.28 h5.08
  text "9. THE PCB MATERIAL MANUFACTURER'S RECOMMENDATIONS FOR PCB MATERIAL STORAGE, PRE-PROCESS" at -317.22,200.66 h5.08
  text "BAKEOUT, PROCESSING AND MATERIAL HANDLING SHALL BE STRICTLY FOLLOWED DURING ALL ASSEMBLY" at -312.14,193.04 h5.08
  text "PROCESSES. DEVIATION FROM THESE STANDARDS REQUIRES WRITTEN AUTHORIZATION FROM OCEAN OPTICS, INC" at -312.14,185.42 h5.08
  text "10. MARK LAST 3 DIGITS OF DRAWING NUMBER (-XXX) IN A CLEAR AND LEGIBLE MANNER USING POLYIMIDE BRADY LABEL" at -319.76,177.8 h5.08
  text "11. MARK DOCUMENT REVISION IN A CLEAR AND LEGIBLE MANNER USING POLYIMIDE BRADY LABEL" at -319.76,170.18 h5.08
  text "12. ALL PROCESSES AND PROCEDURES SHALL BE ROHS COMPLIANT" at -319.76,162.56 h5.08
  text "13. COMPLETED CIRCUIT CARD ASSEMBLIES SHALL BE PACKAGED INDIVIDUALLY" at -319.76,154.94 h5.08
  text "IN STATIC SHIELDING PACKAGING IN ACCORDANCE WITH ANSI/ESD-S-20.20" at -312.14,147.32 h5.08
  text "B" at -346.17,92.665 h5.08
  text "B" at 492.117,92.665 h5.08
  text "Dimensions in mm" at 374,-38 h6.35
  text "Scale  3:1" at 269,-42 h12.7
  text "C" at -345.585,-46.808 h5.08
  text "C" at 492.701,-46.808 h5.08
  text "SEE SEPARATE PARTS LIST." at 223.546,-165.602 h10.16
  text "DFTG" at 264.44,-174.521 h2.54
  text ".NameDftg" at 277.648,-174.521 h2.54
  text ".DateDftg" at 317.272,-174.521 h2.54
  text "UNLESS OTHERWISE SPECIFIED," at 209.576,-178.839 h2.03
  text "MATERIAL:" at 146.406,-179.064 h2.54
  text "ENG" at 264.44,-181.125 h2.54
  text ".NameEng" at 277.648,-181.125 h2.54
  text ".DateEng" at 317.272,-181.125 h2.54
  text "INCHES" at 245.644,-182.366 h2.03
  text "DIMENSIONS ARE IN" at 209.576,-182.395 h2.03
  text "D" at -345.838,-186.507 h5.08
  text "D" at 492.449,-186.507 h5.08
  text "MECH" at 264.44,-186.713 h2.54
  text "*" at 277.648,-187.221 h2.54
  text "*" at 317.272,-187.221 h2.54
  text "TITLE:" at 356.25,-189.253 h2.54
  text "TOLERANCES:" at 209.576,-190.269 h2.54
  text "SEE NOTES" at 148.235,-192.272 h2.54
  text "MFG" at 264.44,-193.317 h2.54
  text "*" at 277.648,-193.317 h2.54
  text "*" at 317.272,-193.825 h2.54
  text ".X +/- 0.1" at 210.592,-194.841 h2.54
  text ".XX +/- 0.01" at 210.592,-197.889 h2.54
  text ".TitleCCA" at 362.865,-198.241 h5.59
  text ".XXX +/- 0.001" at 210.592,-200.937 h2.54
  text ".Title0" at 382.41,-207.73 h5.59
  text "THIRD ANGLE PROJECTION" at 147.854,-212.491 h2.54
  text "ALL SHEETS ARE THE" at 214.148,-216.589 h2.54
  text ".Title1" at 367.31,-217.17 h5.59
  text "SAME REVISION STATUS" at 211.799,-221.161 h2.54
  text "SIZE" at 356.388,-224.305 h2.54
  text "DRAWING NUMBER" at 366.04,-224.305 h2.54
  text "REV" at 473.112,-225.855 h3.05
  text "D" at 356.43,-232.146 h5.08
  text ".DocNumber" at 366.04,-232.404 h6.6
  text ".Rev" at 472.72,-232.404 h5.08
  text "1" at 457.48,-237.484 h2.54
  text "2" at 472.72,-237.484 h2.54
  text "1:1" at 369.85,-237.738 h2.54
  text "SCALE" at 355.824,-237.913 h2.54
  text "SHEET   OF" at 441.731,-238.128 h2.54
  text "8" at 449.606,-248.66 h5.08
  text "1" at -303.885,-248.914 h5.08
  text "2" at -196.323,-249.908 h5.08
  text "4" at 19.75,-249.908 h5.08
  text "3" at -88.329,-250.068 h5.08
  text "5" at 127.749,-250.068 h5.08
  text "6" at 235.696,-250.068 h5.08
  text "7" at 343.67,-250.068 h5.08
Drill Drawing:
  lines w0.381: -277.048,-180.334 -277.048,-172.714 ; -259.323,-180.334 -259.323,-172.714 ; -225.145,-180.334 -225.145,-172.714 ; -212.296,-180.334 -212.296,-172.714 ; -291.04,-180.334 -192.514,-180.334 -192.514,-172.714 -291.04,-172.714 -291.04,-180.334 ; -291.04,-176.524 -192.514,-176.524 -291.04,-176.524
  text "Symbol" at -288.754,-175.381 h1.83
  text "Hit Count" at -275.905,-175.381 h1.83
  text "Finished Hole Size" at -258.18,-175.381 h1.83
  text "Plated" at -224.002,-175.381 h1.83
  text "Hole Type" at -211.153,-175.381 h1.83
ASSY_BOT:
  lines w0.198: -327.242,282.708 -167.527,282.708 ; -327.242,287.788 -167.527,287.788 ; -294.146,282.835 -294.141,293.373 ; -261.507,282.327 -261.507,293.376 ; -180.227,276.993 -180.227,293.376 ; -352.78,-252.527 -352.78,306.076 ; -352.78,-252.527 510.653,-252.527 ; -352.78,-252.527 510.653,-252.527 ; -352.78,-252.527 -352.78,306.076 ; -352.78,306.076 510.653,306.076 ; -352.78,306.076 510.653,306.076 ; 510.653,-252.527 510.653,306.076 ; 510.653,-252.527 510.653,306.076
  lines w0.599: -346.612,-106.677 -327.562,-106.677 ; -346.612,166.372 -327.562,166.372 ; -327.562,293.371 -327.562,-240.027 ; -327.562,-220.977 -197.514,-220.977 ; -312.551,-233.677 -312.551,-220.977 ; -283.112,-240.027 -283.112,-233.677 ; -245.012,-249.552 -245.012,-240.027 ; -197.515,-239.897 -197.515,-221.358 ; -167.649,276.358 -167.649,293.373 ; -137.063,-249.552 -137.063,-240.027 ; -137.063,293.371 -137.063,302.896 ; -29.113,-249.552 -29.113,-240.027 ; -29.113,293.371 -29.113,302.896 ; 186.787,-249.552 186.787,-240.027 ; 186.787,293.371 186.787,302.896 ; 294.737,-249.552 294.737,-240.027 ; 402.686,-249.552 402.686,-240.027 ; 402.686,293.371 402.686,302.896 ; 485.236,166.372 504.286,166.372 ; 485.236,293.373 -327.575,293.373 ; 485.871,-106.677 504.921,-106.677 ; -327.575,293.373 -327.575,272.896 -327.575,293.373 ; -327.562,-240.027 485.236,-240.027 ; -327.562,-240.027 485.236,-240.027 ; -327.562,-240.027 485.236,-240.027 ; -327.562,-240.027 485.236,-240.027 ; -327.562,-233.677 -197.514,-233.677 ; -327.562,-233.677 -197.514,-233.677 ; -327.562,-233.677 -197.514,-233.677 ; -327.562,-233.677 -197.514,-233.677 ; -255.172,293.371 -255.172,303.023 ; -255.172,293.371 -255.172,303.023 ; -255.172,293.371 -255.172,303.023 ; -255.172,293.371 -255.172,303.023 ; -255.172,293.371 -255.172,303.023 ; -255.172,293.371 -255.172,303.023 ; -255.172,293.371 -255.172,303.023 ; -255.172,293.371 -255.172,303.023 ; -255.172,303.023 -167.629,303.023 ; -255.172,303.023 -172.622,303.023 -255.172,303.023 ; -255.172,303.023 -167.629,303.023 ; -242.472,293.371 -242.472,303.023 ; -242.472,293.371 -242.472,303.023 ; -242.472,293.371 -242.472,303.023 ; -242.472,293.371 -242.472,303.023 ; -167.629,303.023 -167.629,293.371 -167.629,303.023 ; 294.737,293.371 294.737,302.896 ; 294.737,293.371 294.737,302.896 ; 294.737,293.371 294.737,302.896 ; 294.737,293.371 294.737,302.896 ; 485.236,-240.027 485.236,285.548 485.236,-240.027 ; 485.236,-240.027 485.236,293.371 ; 485.236,-240.027 485.236,293.371 ; 485.236,-240.027 485.236,293.371 ; -337.722,25.91 -337.722,27.434 -332.642,27.434 -332.642,29.212 -327.562,26.672 -332.642,24.132 -332.642,25.91 -337.722,25.91 ; 76.297,-245.107 78.837,-240.027 81.377,-245.107 79.599,-245.107 79.599,-250.187 78.075,-250.187 78.075,-245.107 76.297,-245.107 ; 76.297,298.451 78.837,293.371 81.377,298.451 79.599,298.451 79.599,303.53 78.075,303.53 78.075,298.451 76.297,298.451 ; 485.236,26.672 490.316,24.132 490.316,25.91 495.396,25.91 495.396,27.434 490.316,27.434 490.316,29.212 485.236,26.672
  text "SH" at -243.3,299.933 h2.54
  text "DWG NO" at -168.148,299.518 h2.54
  text ".DocNumber" at -184.799,296.678 h3.05
  text "8" at -286.235,296.19 h5.08
  text "4" at 138.123,296.19 h5.08
  text "2" at 354.196,296.19 h5.08
  text "6" at -77.823,296.03 h5.08
  text "5" at 30.124,296.03 h5.08
  text "3" at 246.202,296.03 h5.08
  text "3" at 246.202,296.03 h5.08
  text "1" at 461.924,296.03 h5.08
  text "1" at -248.299,295.662 h3.05
  text "REVISION HISTORY" at -194.451,289.283 h2.54
  text "APPROVED" at -304.687,283.216 h2.54
  text "DATE" at -274.207,283.216 h2.54
  text "DESCRIPTION" at -215.787,283.216 h2.54
  text "REV" at -170.067,283.216 h2.54
  text "SEE SHEET 1" at -182.767,278.136 h2.54
  text "A" at -334.294,232.525 h5.08
  text "A" at 503.993,232.525 h5.08
  text "B" at -334.244,92.665 h5.08
  text "B" at 504.043,92.665 h5.08
  text "Scale  3:1" at 317.36,-41.12 h12.7
  text "C" at -334.828,-46.808 h5.08
  text "C" at 503.458,-46.808 h5.08
  text "D" at -334.576,-186.507 h5.08
  text "D" at 503.711,-186.507 h5.08
  text "REV" at -315.239,-225.855 h3.05
  text ".DocNumber" at -203.722,-231.134 h5.08
  text ".Rev" at -314.847,-232.404 h5.08
  text "2" at -314.847,-237.484 h2.54
  text "SHEET 2 OF" at -283.858,-238.128 h2.54
  text "8" at -291.733,-248.66 h5.08
  text "1" at 461.925,-248.914 h5.08
  text "4" at 138.123,-249.908 h5.08
  text "2" at 354.196,-249.908 h5.08
  text "7" at -185.797,-250.068 h5.08
  text "6" at -77.823,-250.068 h5.08
  text "5" at 30.124,-250.068 h5.08
  text "3" at 246.202,-250.068 h5.08
PCB_SHEET1:
  drawing of 741 lines, arcs and shapes, not listed
  text "SH" at 401.173,299.927 h2.54
  text "DWG NO" at 326.021,299.513 h2.54
  text "DWG NO" at 326.021,299.518 h2.54
  text ".DocNumberPCB" at 342.672,296.672 h3.05
  text "2" at -196.323,296.184 h5.08
  text "4" at 19.75,296.184 h5.08
  text "8" at 444.108,296.184 h5.08
  text "1" at -304.051,296.024 h5.08
  text "3" at -88.329,296.024 h5.08
  text "5" at 127.749,296.024 h5.08
  text "6" at 235.696,296.024 h5.08
  text "1" at 406.172,295.656 h3.05
  text "REVISION HISTORY" at 352.324,289.278 h2.54
  text "REV" at 327.94,283.21 h2.54
  text "DESCRIPTION" at 373.66,283.21 h2.54
  text "DATE" at 432.08,283.21 h2.54
  text "APPROVED" at 462.56,283.21 h2.54
  text "11" at 30.76,279.4 h5.08
  text "5" at 40.412,279.4 h5.08
  text ".Hist1Rev" at 328.845,278.61 h2.54
  text "LAYER STACKUP:" at 50.572,278.13 h10.16
  text ".Hist1Desc" at 340.64,278.13 h2.54
  text ".Hist1Date" at 424.46,278.13 h2.54
  text ".Hist1Appr" at 454.94,278.13 h2.54
  text "NOTES" at -317.22,276.86 h10.16
  text ".Hist2Rev" at 328.845,273.047 h2.54
  text ".Hist2Desc" at 340.64,272.567 h2.54
  text ".Hist2Date" at 424.46,272.567 h2.54
  text ".Hist2Appr" at 454.94,272.567 h2.54
  text "1. UNLESS OTHERWISE SPECIFIED, DIMENSIONS, TOLERANCES, AND SURFACE TEXTURE APPLY" at -317.22,269.24 h5.08
  text ".Hist3Rev" at 328.845,267.434 h2.54
  text ".Hist3Desc" at 340.64,266.954 h2.54
  text ".Hist3Date" at 424.46,266.954 h2.54
  text ".Hist3Appr" at 454.94,266.954 h2.54
  text "AFTER PLATING OR CHEMICAL FILM TREATMENTS, AND PRIOR TO ORGANIC COATINGS." at -312.14,261.62 h5.08
  text "Layer" at 30.752,256.502 h1.52
  text "Name" at 41.266,256.502 h1.52
  text "Material" at 65.237,256.502 h1.52
  text "Thickness" at 87.176,256.502 h1.52
  text "Constant" at 103.784,256.502 h1.52
  text "Board Layer Stack" at 118.36,256.502 h1.52
  text "2. DIMENSIONING AND TOLERANCING PER ASME Y14.5M-1994" at -317.22,254 h5.08
  text "1" at 30.752,253.454 h1.52
  text "Top Overlay" at 41.266,253.454 h1.52
  text "2" at 30.752,250.406 h1.52
  text "Top Solder" at 41.266,250.406 h1.52
  text "Solder Resist" at 65.237,250.406 h1.52
  text "0.40mil" at 87.176,250.406 h1.52
  text "3.5" at 103.784,250.406 h1.52
  text "3" at 30.752,247.358 h1.52
  text "Component Side" at 41.266,247.358 h1.52
  text "Copper" at 65.237,247.358 h1.52
  text "1.40mil" at 87.176,247.358 h1.52
  text "3. PARTS SHALL BE FREE OF BURRS AND SHARP EDGES. BREAK SHARP EDGES .005\" MAX" at -317.22,246.38 h5.08
  text "4" at 30.752,244.31 h1.52
  text "Dielectric 1" at 41.266,244.31 h1.52
  text "FR-4" at 65.237,244.31 h1.52
  text "39.37mil" at 87.176,244.31 h1.52
  text "4.2" at 103.784,244.31 h1.52
  text "5" at 30.752,241.262 h1.52
  text "Bottom Layer" at 41.266,241.262 h1.52
  text "Copper" at 65.237,241.262 h1.52
  text "1.40mil" at 87.176,241.262 h1.52
  text "4. UNLESS OTHERWISE SPECIFIED, BOARD SHALL MEET THE REQUIREMENTS OF IPC-6011" at -317.22,238.76 h5.08
  text "6" at 30.752,238.214 h1.52
  text "Solder Side" at 41.266,238.214 h1.52
  text "Solder Resist" at 65.237,238.214 h1.52
  text "0.40mil" at 87.176,238.214 h1.52
  text "3.5" at 103.784,238.214 h1.52
  text "7" at 30.752,235.166 h1.52
  text "Bottom Overlay" at 41.266,235.166 h1.52
  text "A" at -346.12,232.519 h5.08
  text "A" at 492.167,232.519 h5.08
  text "CLASS 2, AND IPC-6012, TYPE 2." at -312.14,231.14 h5.08
  text "OVERALL HEIGHT = 0.xxx +/- 10%" at 22.759,226.574 h5.08
  text "5. MATERIAL: POLYCLAD 370HR OR EQUIVALENT IAW IPC-4101. THIS BOARD IS INTENDED FOR LEAD-FREE" at -317.22,223.52 h5.08
  text "TOP AND BOTTOM LAYER COPPER THICKNESS SPECIFIED AFTER PLATING" at 22.759,219.583 h5.08
  text "ASSEMBLY (RoHS COMPLIANT). FLAMMABILITY RATING OF 94V-0 OR BETTER REQUIRED. BOARD MUST BE UL" at -312.14,215.9 h5.08
  text "RECOGNIZED AND VENDOR SHALL AFFIX UL LISTING DESIGNATION ON PRINTED CIRCUIT BOARD." at -312.14,208.28 h5.08
  text "A. BASE LAMINATE: WOVEN GLASS BASED EPOXY RESIN." at -312.14,200.66 h5.08
  text "SEE STACK DETAIL FOR COPPER WEIGHT, SUBSTRATES, AND FINISHED BOARD THICKNESS" at -305.79,193.04 h5.08
  text "B. BONDING AGENT: PREIMPREGNATED B-STAGE EPOXY CLOTH (GF)" at -312.14,185.42 h5.08
  text "C. FINISH TO BE DONE USING IMMERSION GOLD (ENIG) 3-6 MICROINCHES OVER NICKEL 100 MICROINCHES MIN." at -312.14,177.8 h5.08
  text "FULL BODY IMMERSION GOLD ACCEPTED." at -305.79,170.18 h5.08
  text "D. SILKSCREEN TO BE DONE USING NON-CONDUCTIVE WHITE EPOXY INK. VENDOR MAY VIA CAP OR PLUG VIAS" at -312.14,162.56 h5.08
  text "BEFORE FINAL SOLDERMASK TO AVOID TRIMMING OF SILKSCREEN. SILKSCREEN INK NOT ALLOWED ON ANY" at -305.79,154.94 h5.08
  text "EXPOSED ETCH. VENDOR TO DETERMINE BEST PROCESS TO ENSURE THIS." at -305.79,147.32 h5.08
  text "E. SOLDERMASK OVER BARE COPPER FOLLOWED BY PLATING PER LAYER STACKUP." at -312.14,139.7 h5.08
  text "SOLDERMASK IS TO BE FREE OF SHADED AREAS, AND IS TO BE BLACK, TYPE B1, CLASS 2, IAW IPC-SM-840." at -305.79,132.08 h5.08
  text "6. FINAL TRACES WIDTHS AND LAND SIZES REPRESENTED BY ARTWORK. THE FINAL" at -317.22,124.46 h5.08
  text "CONDUCTOR WIDTH SHALL BE +/- 0.001\" OF THE ORIGINAL ARTWORK TRACE. THE PCB" at -312.14,116.84 h5.08
  text "MANUFACTURER IS DIRECTED TO INFLATE FEATURES IN THE SUPPLIED GERBER FILES, AS" at -312.14,109.22 h5.08
  text "NECESSARY, TO COMPENSATE FOR THE ETCHBACK IN THE PCB MANUFACTURER'S PROCESS." at -312.14,101.6 h5.08
  text "7. MANUFACTURER TO INSERT COMPANY LOGO AND DATE CODE IN BOTTOM SILKSCREEN," at -317.855,93.98 h5.08
  text "B" at -346.17,92.66 h5.08
  text "B" at 492.117,92.66 h5.08
  text "USING PREFERRED METHOD (NON-CONDUCTIVE)." at -312.14,86.36 h5.08
  text "8. UNLESS OTHERWISE SPECIFIED:" at -317.855,78.74 h5.08
  text "A. ALL HOLES TO BE CONCENTRIC WITH PAD CENTER WITHIN +/- 0.005\"." at -312.14,71.12 h5.08
  text "B. ALL HOLE DIAMETERS TO BE WITHIN +/- 0.003\" OF SPECIFIED DIAMETER." at -312.14,63.5 h5.08
  text "C. PLATED THROUGH HOLE DIAMETERS SPECIFIED AFTER PLATING." at -312.14,55.88 h5.08
  text "9. FABRICATE AND TEST BOARD, TYPE 2, CLASS 1, LEVEL A, PER IPC-D-275. VENDOR MUST USE IPC D 356 NETLIST" at -317.22,48.26 h5.08
  text "PROVIDED PRIOR TO BOARD FABRICATION AND REPORT ANY DISCREPANCIES WHEN COMPARED WITH THE GERBERS." at -312.14,40.64 h5.08
  text "10. INFORMATION IN PARENTHESIS IS FOR REFERENCE ONLY." at -317.22,33.02 h5.08
  text "11. MAINTAIN CONTROLLED IMPEDANCES:" at -317.517,24.676 h5.08
  text "A. HS-USB - Bottom Layer differential pair; 90 ohms differential impedance; Length differences < 25 mils" at -312.602,17.746 h5.08
  text "Trace Width = 15.0mils; Inside Gap = 6.3mils. (Microstrip Differential Pair)" at -306.431,10.445 h5.08
  text "12. VENDOR IS ALLOWED TO DO THE FOLLOWING:" at -318.198,2.304 h5.08
  text "A. FOLLOW BOARD OUTLINE FOR SIZE OF BOARD." at -312.602,-5.227 h5.08
  text "B. REMOVE INTERNAL NON FUNCTIONAL PADS." at -312.602,-12.758 h5.08
  text "C. ADD TEAR DROPPING" at -312.602,-20.289 h5.08
  text "D. REMOVE SOLDERMASK SLIVERS LESS THAN 0.003 TO ENHANCE PRODUCABILITY." at -312.602,-27.82 h5.08
  text "Scale  3:1" at 269.36,-41.12 h12.7
  text "C" at -345.585,-46.814 h5.08
  text "C" at 492.701,-46.814 h5.08
  text "DFTG" at 264.44,-174.526 h2.54
  text ".NameDftg" at 277.648,-174.526 h2.54
  text ".DateDftg" at 317.272,-174.526 h2.54
  text "UNLESS OTHERWISE SPECIFIED," at 209.576,-178.844 h2.03
  text "MATERIAL:" at 146.406,-179.07 h2.54
  text "ENG" at 264.44,-181.13 h2.54
  text ".NameEng" at 277.648,-181.13 h2.54
  text ".DateEng" at 317.272,-181.13 h2.54
  text "INCHES" at 245.644,-182.372 h2.03
  text "DIMENSIONS ARE IN" at 209.576,-182.4 h2.03
  text "D" at -345.838,-186.513 h5.08
  text "D" at 492.449,-186.513 h5.08
  text "MECH" at 264.44,-186.718 h2.54
  text "*" at 277.648,-187.226 h2.54
  text "*" at 317.272,-187.226 h2.54
  text "TITLE:" at 356.25,-189.258 h2.54
  text "TOLERANCES:" at 209.576,-190.274 h2.54
  text "SEE NOTES" at 148.235,-192.278 h2.54
  text "MFG" at 264.44,-193.322 h2.54
  text "*" at 277.648,-193.322 h2.54
  text "*" at 317.272,-193.83 h2.54
  text ".X +/- 0.1" at 210.592,-194.841 h2.54
  text ".XX +/- 0.01" at 210.592,-197.889 h2.54
  text ".TitlePCB" at 362.738,-198.12 h5.59
  text ".XXX +/- 0.005" at 210.592,-200.937 h2.54
  text ".Title0" at 382.46,-207.93 h5.59
  text "THIRD ANGLE PROJECTION" at 147.854,-212.496 h2.54
  text "ALL SHEETS ARE THE" at 214.148,-216.594 h2.54
  text ".Title1" at 367.31,-217.17 h5.59
  text "SAME REVISION STATUS" at 211.799,-221.166 h2.54
  text "SIZE" at 356.388,-224.31 h2.54
  text "DRAWING NUMBER" at 366.04,-224.31 h2.54
  text "REV" at 473.112,-225.861 h3.05
  text "D" at 356.43,-232.151 h5.08
  text ".DocNumberPCB" at 366.04,-232.41 h6.6
  text ".Rev" at 472.72,-232.41 h5.08
  text "1" at 457.48,-237.49 h2.54
  text "1" at 472.72,-237.49 h2.54
  text "1:1" at 369.85,-237.744 h2.54
  text "SCALE" at 355.824,-237.919 h2.54
  text "SHEET   OF" at 441.731,-238.134 h2.54
  text "8" at 449.606,-248.666 h5.08
  text "1" at -303.885,-248.92 h5.08
  text "2" at -196.323,-249.914 h5.08
  text "4" at 19.75,-249.914 h5.08
  text "3" at -88.329,-250.073 h5.08
  text "5" at 127.749,-250.073 h5.08
  text "6" at 235.696,-250.073 h5.08
  text "7" at 343.67,-250.073 h5.08
PCB_SHEET2:
  lines w0.198: -327.242,282.708 -167.527,282.708 ; -327.242,287.788 -167.527,287.788 ; -294.146,282.835 -294.141,293.373 ; -261.507,282.327 -261.507,293.376 ; -180.227,276.993 -180.227,293.376 ; -352.78,-252.527 -352.78,306.076 ; -352.78,-252.527 510.653,-252.527 ; -352.78,-252.527 510.653,-252.527 ; -352.78,-252.527 -352.78,306.076 ; -352.78,306.076 510.653,306.076 ; -352.78,306.076 510.653,306.076 ; 510.653,-252.527 510.653,306.076 ; 510.653,-252.527 510.653,306.076
  lines w0.599: -346.612,-106.677 -327.562,-106.677 ; -346.612,166.372 -327.562,166.372 ; -327.562,293.371 -327.562,-240.027 ; -327.562,-220.977 -197.514,-220.977 ; -312.551,-233.677 -312.551,-220.977 ; -283.112,-240.027 -283.112,-233.677 ; -245.012,-249.552 -245.012,-240.027 ; -197.515,-239.897 -197.515,-221.358 ; -167.649,276.358 -167.649,293.373 ; -137.063,-249.552 -137.063,-240.027 ; -137.063,293.371 -137.063,302.896 ; -29.113,-249.552 -29.113,-240.027 ; -29.113,293.371 -29.113,302.896 ; 186.787,-249.552 186.787,-240.027 ; 186.787,293.371 186.787,302.896 ; 294.737,-249.552 294.737,-240.027 ; 402.686,-249.552 402.686,-240.027 ; 402.686,293.371 402.686,302.896 ; 485.236,166.372 504.286,166.372 ; 485.236,293.373 -327.575,293.373 ; 485.871,-106.677 504.921,-106.677 ; -327.575,293.373 -327.575,272.896 -327.575,293.373 ; -327.562,-240.027 485.236,-240.027 ; -327.562,-240.027 485.236,-240.027 ; -327.562,-240.027 485.236,-240.027 ; -327.562,-240.027 485.236,-240.027 ; -327.562,-233.677 -197.514,-233.677 ; -327.562,-233.677 -197.514,-233.677 ; -327.562,-233.677 -197.514,-233.677 ; -327.562,-233.677 -197.514,-233.677 ; -255.172,293.371 -255.172,303.023 ; -255.172,293.371 -255.172,303.023 ; -255.172,293.371 -255.172,303.023 ; -255.172,293.371 -255.172,303.023 ; -255.172,293.371 -255.172,303.023 ; -255.172,293.371 -255.172,303.023 ; -255.172,293.371 -255.172,303.023 ; -255.172,293.371 -255.172,303.023 ; -255.172,303.023 -167.629,303.023 ; -255.172,303.023 -172.622,303.023 -255.172,303.023 ; -255.172,303.023 -167.629,303.023 ; -242.472,293.371 -242.472,303.023 ; -242.472,293.371 -242.472,303.023 ; -242.472,293.371 -242.472,303.023 ; -242.472,293.371 -242.472,303.023 ; -167.629,303.023 -167.629,293.371 -167.629,303.023 ; 294.737,293.371 294.737,302.896 ; 294.737,293.371 294.737,302.896 ; 294.737,293.371 294.737,302.896 ; 294.737,293.371 294.737,302.896 ; 485.236,-240.027 485.236,285.548 485.236,-240.027 ; 485.236,-240.027 485.236,293.371 ; 485.236,-240.027 485.236,293.371 ; 485.236,-240.027 485.236,293.371 ; -337.722,25.91 -337.722,27.434 -332.642,27.434 -332.642,29.212 -327.562,26.672 -332.642,24.132 -332.642,25.91 -337.722,25.91 ; 76.297,-245.107 78.837,-240.027 81.377,-245.107 79.599,-245.107 79.599,-250.187 78.075,-250.187 78.075,-245.107 76.297,-245.107 ; 76.297,298.451 78.837,293.371 81.377,298.451 79.599,298.451 79.599,303.53 78.075,303.53 78.075,298.451 76.297,298.451 ; 485.236,26.672 490.316,24.132 490.316,25.91 495.396,25.91 495.396,27.434 490.316,27.434 490.316,29.212 485.236,26.672
  text "SH" at -243.3,299.933 h2.54
  text "DWG NO" at -168.148,299.518 h2.54
  text ".DocNumberPCB" at -184.799,296.678 h3.05
  text "8" at -286.235,296.19 h5.08
  text "4" at 138.123,296.19 h5.08
  text "2" at 354.196,296.19 h5.08
  text "6" at -77.823,296.03 h5.08
  text "5" at 30.124,296.03 h5.08
  text "3" at 246.202,296.03 h5.08
  text "3" at 246.202,296.03 h5.08
  text "1" at 461.924,296.03 h5.08
  text "1" at -248.299,295.662 h3.05
  text "REVISION HISTORY" at -194.451,289.283 h2.54
  text "APPROVED" at -304.687,283.216 h2.54
  text "DATE" at -274.207,283.216 h2.54
  text "DESCRIPTION" at -215.787,283.216 h2.54
  text "REV" at -170.067,283.216 h2.54
  text "SEE SHEET 1" at -182.767,278.136 h2.54
  text "A" at -334.294,232.525 h5.08
  text "A" at 503.993,232.525 h5.08
  text "B" at -334.244,92.665 h5.08
  text "B" at 504.043,92.665 h5.08
  text "Scale  3:1" at 317.033,-41.16 h12.7
  text "C" at -334.828,-46.808 h5.08
  text "C" at 503.458,-46.808 h5.08
  text "D" at -334.576,-186.507 h5.08
  text "D" at 503.711,-186.507 h5.08
  text "REV" at -315.239,-225.855 h3.05
  text ".DocNumberPCB" at -203.722,-231.134 h5.08
  text ".Rev" at -314.847,-232.404 h5.08
  text "2" at -314.847,-237.484 h2.54
  text "SHEET 2 OF" at -283.858,-238.128 h2.54
  text "8" at -291.733,-248.66 h5.08
  text "1" at 461.925,-248.914 h5.08
  text "4" at 138.123,-249.908 h5.08
  text "2" at 354.196,-249.908 h5.08
  text "7" at -185.797,-250.068 h5.08
  text "6" at -77.823,-250.068 h5.08
  text "5" at 30.124,-250.068 h5.08
  text "3" at 246.202,-250.068 h5.08
Mechanical 34:
  circle w0.254: c43.502,9 r10

## Dimensions
35,0 to 5,0 on ASSY_TOP
90,0 to 0,0 on ASSY_TOP
0,26 to 0,0 on ASSY_TOP

## Panel: embedded boards
"Volta-Interface.PcbDoc" at 127,-31, 1 rows x 1 columns, spacing 63.5 x 38.1, rotation 0

## Text inside footprints (layer, text, board x,y; h text height)
D1: Bottom Overlay "K" at 45.925,23.85 h1.02
D2: Bottom Overlay "K" at 45.925,21.85 h1.02
D3: Bottom Overlay "K" at 45.925,19.85 h1.02
Y1: Bottom Overlay "o" at 3.117,10.631 h0.25 r270